# Altium PCB myPCB.PcbDoc
Units mil, origin at the board's own origin, x right, y up, seen from the top; angles counter-clockwise.
Board outline 4172.5 x 3212.5 mil, 2 copper layers (Top Layer, Bottom Layer); 26 components, 19 nets, 122 pads, 1 vias.
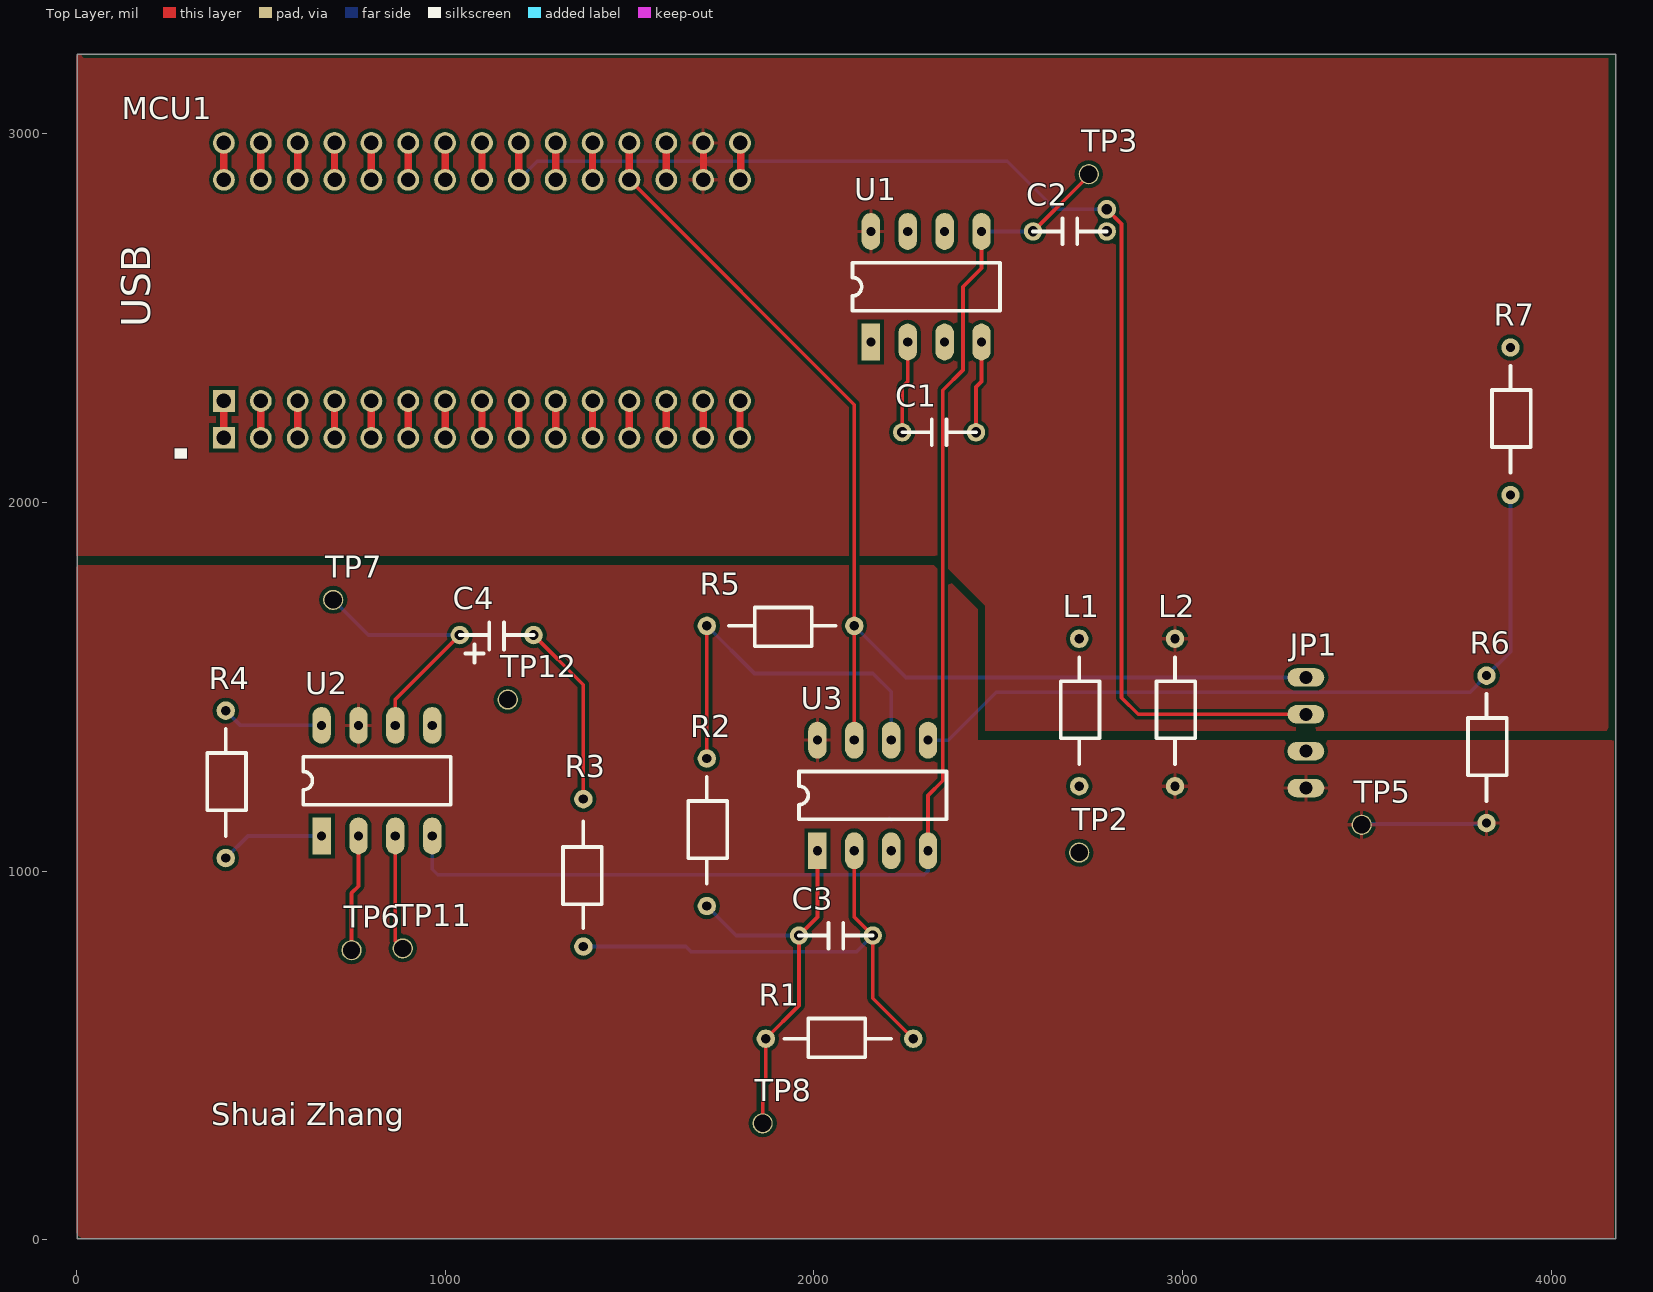
[diagram p0: Top Layer view]
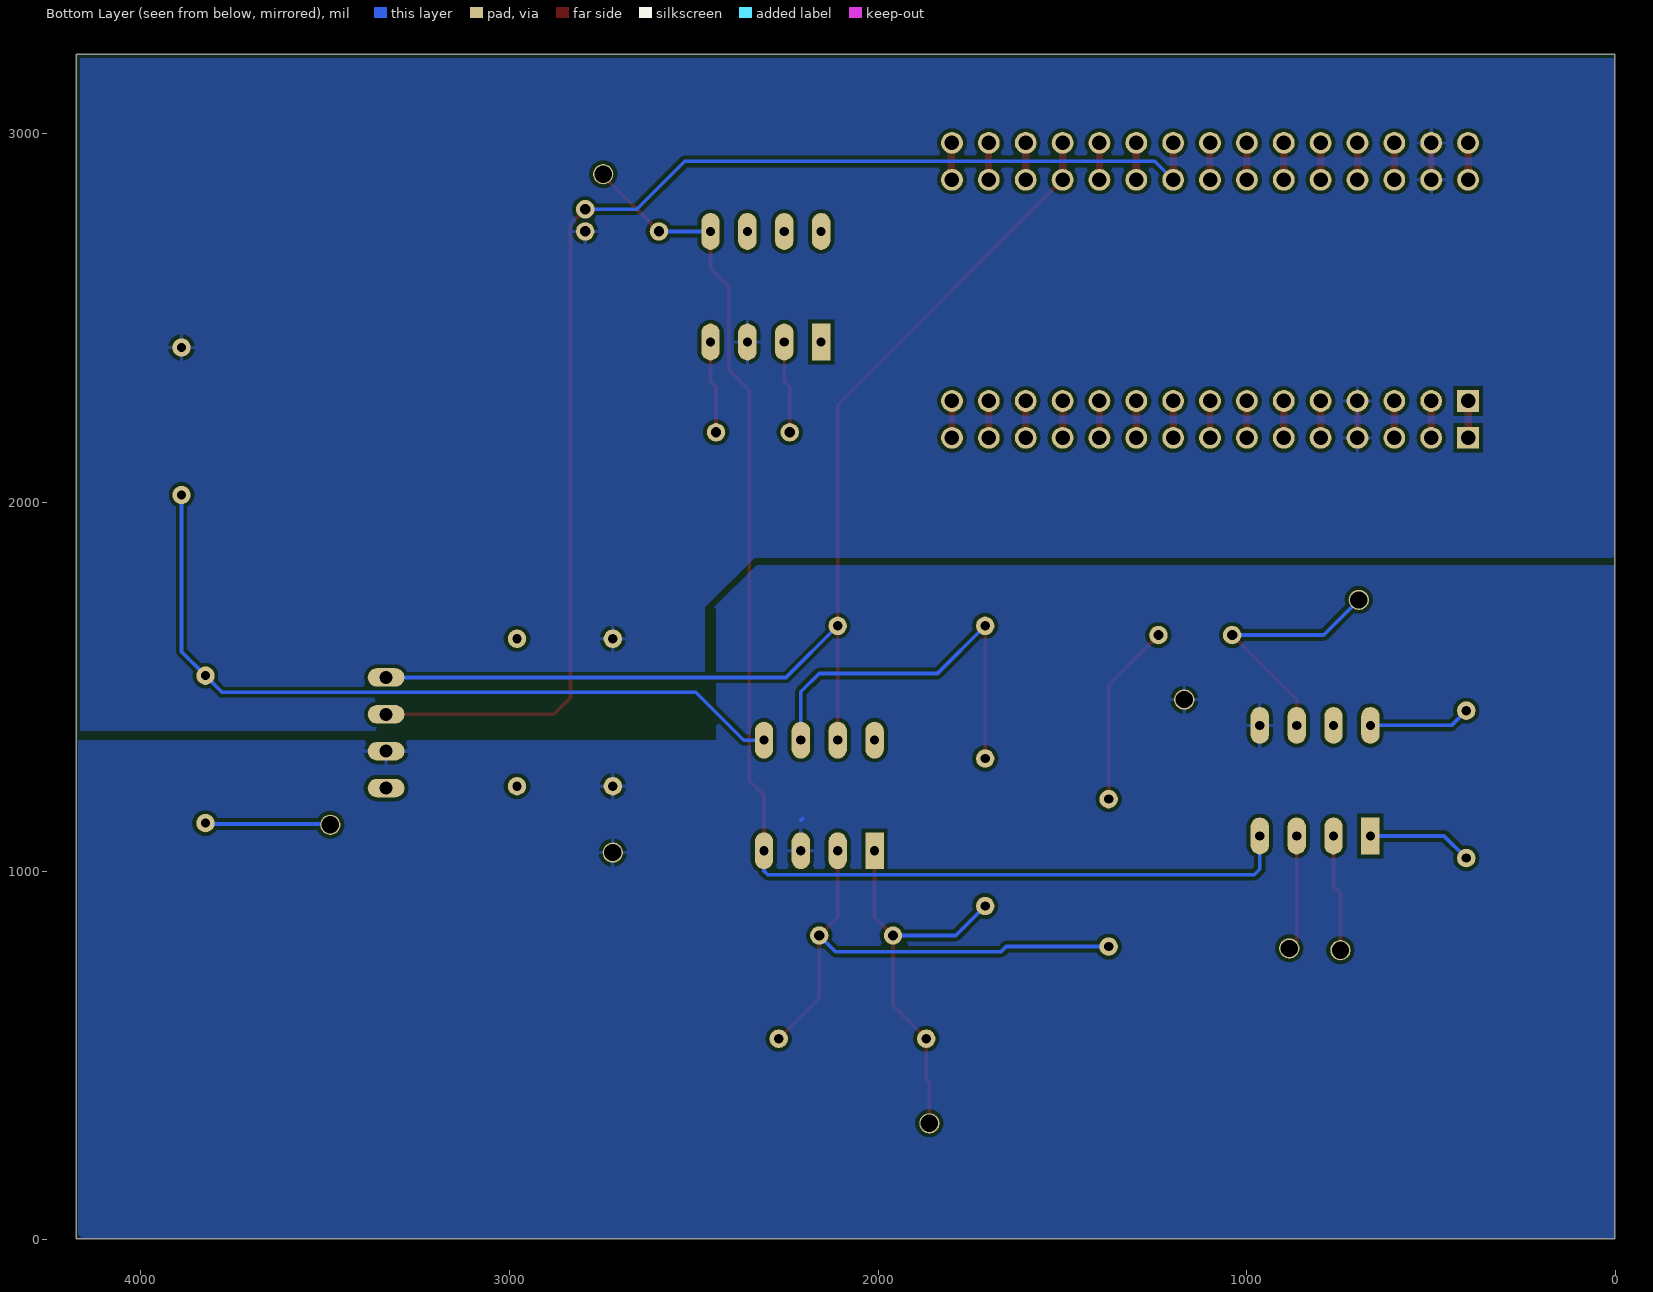
[diagram p1: Bottom Layer view, seen from below]

## Layer stack, top to bottom
Top Solder: solder mask 0.4, Solder Resist, Dk 3.5
Top Layer: signal copper 1.4
Dielectric 1: dielectric 12.6, FR-4, Dk 4.8
Bottom Layer: signal copper 1.4
Bottom Solder: solder mask 0.4, Solder Resist, Dk 3.5

## Board outline
2.5,2.5 4175,2.5 4175,3215 2.5,3215

## Design rules (kind name [scope] priority, off if disabled: settings)
Clearance [All] p1: gap=10 ignorepadtopadclearanceinfootprint=FALSE except(0: Arc-Hole Track-Hole SMDPad-Hole THPad-Hole Via-Hole Fill-Hole Poly-Hole Region-Hole Text-Hole)
PolygonConnect [All] p1: connectstyle=Relief reliefconductorwidth=10 reliefentries=4 polygonreliefangle="90 Angle" airgapwidth=10
RoutingVias [All] p1: holewidth=28 width=50 viastyle="Through Hole" minholewidth=28 minwidth=50 maxholewidth=28 maxwidth=50
SolderMaskExpansion [All] p1: expansion=4
Width [All] p1: maxlimit=10 minlimit=10 preferedwidth=10
30 further rules are at their usual default settings.

## Components (designator, comment, footprint, x,y, rotation, side; value= is the part's Value field where it differs from the comment)
C1 "Cap-10u" Capacitor 2440,2190 r180 top
C2 "Cap-10u" Capacitor 2795,2735 r180 top
C3 "Cap-100pF" Capacitor 1960,825 r0 top
C4 "Cap-22uF" "Capacitor - Polarized" 1040,1640 r0 top
JP1 "Header4x1" "4 pin header" 3335,1225 r180 top
L1 "FerriteBead" RESISTOR 2720,1230 r90 top
L2 "FerriteBead" RESISTOR 2980,1230 r90 top
MCU1 "Nucleo F303K8_STUDENT" "Nucleo F303K8" 1100,2575 r90 top
R1 "Res-3M" RESISTOR 2270,545 r180 top
R2 "20k" RESISTOR 1710,905 r90 top
R3 "15k" RESISTOR 1375,1195 r270 top
R4 "Res-10k" RESISTOR 405,1035 r90 top
R5 "Res-10k" RESISTOR 1710,1665 r0 top
R6 "20k" RESISTOR 3825,1130 r90 top
R7 "Res-10k" RESISTOR 3890,2020 r90 top
TP2 "TestPoint" TestPoint 2718.74,1049.68 r90 top
TP3 "TestPoint" TestPoint 2745,2890 r90 top
TP5 "TestPoint" TestPoint 3485,1125 r90 top
TP6 "TestPoint" TestPoint 745,785 r90 top
TP7 "TestPoint" TestPoint 695,1735 r90 top
TP8 "TestPoint" TestPoint 1860,315 r90 top
TP11 "TestPoint" TestPoint 883.74,789.68 r90 top
TP12 "TestPoint" TestPoint 1168.74,1464.68 r90 top
U1 "TC962" DIP8 2155,2435 r90 top
U2 "LT1920" DIP8 665,1095 r90 top
U3 "TL072" DIP8 2010,1055 r90 top

## Footprints (in the part's own frame and the unit in brackets; to place one, negate y for a bottom-side part, rotate by r counter-clockwise, add the part's x,y. Pads: shape width x height; smd on the part's side, far side on the other; paste and mask are expansions set on the pad)
"4 pin header" [mm]
  oval 2.54x1.27 hole 0.9: 1(0,0) 2(0,-2.54) 3(0,-5.08) 4(0,-7.62)
Capacitor [mil] "200 mil"
  round 50 hole 28: 1(0,0) 2(200,0)
  silkscreen extent 0,-35 200,35
"Capacitor - Polarized" [mil] "200 mil"
  round 50 hole 28: 1(0,0) 2(200,0)
  silkscreen extent 0,-75 200,35
DIP8 [mil]
  rect 100x50 hole 25: 1(0,0)
  oval 100x50 hole 25: 2(0,-100) 3(0,-200) 4(0,-300) 5(300,-300) 6(300,-200) 7(300,-100) 8(300,0)
  silkscreen extent 85,-350 215,50
"Nucleo F303K8" [mm] "Nucleo Header"
  rect 1.5x1.5 hole 1: 1(-10.16,17.78) 1(-7.62,17.78)
  round 1.5 hole 1: 2(-10.16,15.24) 2(-7.62,15.24) 3(-10.16,12.7) 3(-7.62,12.7) 4(-10.16,10.16) 4(-7.62,10.16) 5(-10.16,7.62) 5(-7.62,7.62) 6(-10.16,5.08) 6(-7.62,5.08) 7(-10.16,2.54) 7(-7.62,2.54) 8(-10.16,0) 8(-7.62,0) 9(-10.16,-2.54) 9(-7.62,-2.54) 10(-10.16,-5.08) 10(-7.62,-5.08) 11(-10.16,-7.62) 11(-7.62,-7.62) 12(-10.16,-10.16) 12(-7.62,-10.16) 13(-10.16,-12.7) 13(-7.62,-12.7) 14(-10.16,-15.24) 14(-7.62,-15.24) 15(-10.16,-17.78) 15(-7.62,-17.78) 16(7.62,-17.78) 16(10.16,-17.78) 17(7.62,-15.24) 17(10.16,-15.24) 18(7.62,-12.7) 18(10.16,-12.7) 19(7.62,-10.16) 19(10.16,-10.16) 20(7.62,-7.62) 20(10.16,-7.62) 21(7.62,-5.08) 21(10.16,-5.08) 22(7.62,-2.54) 22(10.16,-2.54) 23(7.62,0) 23(10.16,0) 24(7.62,2.54) 24(10.16,2.54) 25(7.62,5.08) 25(10.16,5.08) 26(7.62,7.62) 26(10.16,7.62) 27(7.62,10.16) 27(10.16,10.16) 28(7.62,12.7) 28(10.16,12.7) 29(7.62,15.24) 29(10.16,15.24) 30(7.62,17.78) 30(10.16,17.78)
  Top Layer lines w0.508: -10.16,17.78 -7.62,17.78 ; 7.62,17.78 10.16,17.78 ; -10.16,15.24 -7.62,15.24 ; 7.62,15.24 10.16,15.24 ; -10.16,12.7 -7.62,12.7 ; 7.62,12.7 10.16,12.7 ; -10.16,10.16 -7.62,10.16 ; 7.62,10.16 10.16,10.16 ; -10.16,7.62 -7.62,7.62 ; 7.62,7.62 10.16,7.62 ; -10.16,5.08 -7.62,5.08 ; 7.62,5.08 10.16,5.08 ; -10.16,2.54 -7.62,2.54 ; 7.62,2.54 10.16,2.54 ; -10.16,0 -7.62,0 ; 7.62,0 10.16,0 ; -10.16,-2.54 -7.62,-2.54 ; 7.62,-2.54 10.16,-2.54 ; -10.16,-5.08 -7.62,-5.08 ; 7.62,-5.08 10.16,-5.08 ; -10.16,-7.62 -7.62,-7.62 ; 7.62,-7.62 10.16,-7.62 ; -10.16,-10.16 -7.62,-10.16 ; 7.62,-10.16 10.16,-10.16 ; -10.16,-12.7 -7.62,-12.7 ; 7.62,-12.7 10.16,-12.7 ; -10.16,-15.24 -7.62,-15.24 ; -10.16,-17.78 -7.62,-17.78 ; 7.722,-17.831 10.262,-17.831 ; 7.442,-15.265 7.62,-15.265 ; 7.442,-15.265 7.62,-15.265 ; 7.442,-15.265 7.62,-15.265 ; 7.442,-15.265 7.62,-15.265 ; 7.442,-15.265 7.62,-15.265 ; 7.442,-15.265 7.62,-15.265 ; 7.442,-15.265 7.62,-15.265 ; 7.442,-15.265 7.62,-15.265 ; 7.442,-15.265 7.62,-15.265 ; 7.442,-15.265 7.62,-15.265 ; 7.442,-15.265 7.62,-15.265 ; 7.442,-15.265 7.62,-15.265 ; 7.442,-15.265 7.62,-15.265 ; 7.442,-15.265 7.62,-15.265 ; 7.442,-15.265 7.62,-15.265 ; 7.442,-15.265 7.62,-15.265 ; 7.62,-15.265 9.982,-15.265 ; 7.62,-15.265 9.982,-15.265 ; 7.62,-15.265 9.982,-15.265 ; 7.62,-15.265 9.982,-15.265 ; 7.62,-15.265 9.982,-15.265 ; 7.62,-15.265 9.982,-15.265 ; 7.62,-15.265 9.982,-15.265 ; 7.62,-15.265 9.982,-15.265 ; 7.62,-15.265 9.982,-15.265 ; 7.62,-15.265 9.982,-15.265 ; 7.62,-15.265 9.982,-15.265 ; 7.62,-15.265 9.982,-15.265 ; 7.62,-15.265 9.982,-15.265 ; 7.62,-15.265 9.982,-15.265 ; 7.62,-15.265 9.982,-15.265 ; 7.62,-15.265 9.982,-15.265
RESISTOR [mil]
  round 50 hole 25: 1(0,0) 2(400,0)
  silkscreen extent 60,-55 350,50
TestPoint [mil]
  round 55 hole 47 mask+3: 1(0.32,-1.26)

## Part data
C1 C2: Capacitance=10μF, Manufacturer="TDK Corporation", Manufacturer Part Number=FK26X7R1C106K, Operating Temperature="-55°C ~ 125°C", Package / Case=Radial, Ratings=-, Supplier Part Number 1=445-8549-ND, Temperature Coefficient=X7R, Tolerance=±10%, Voltage - Rated=16V, Applications="General Purpose", Category=Capacitors, ComponentLink1Description=https://product.tdk.com/info/en/documents/catalog/leadmlcc_conventional_fk_en.pdf, ComponentLink1URL=https://product.tdk.com/info/en/documents/catalog/leadmlcc_conventional_fk_en.pdf, Features=-, Height - Seated (Max)="0.236\" (6.00mm)", Lead Spacing="0.197\" (5.00mm)", Lead Style="Formed Leads - Kinked", Mounting Type="Through Hole", Packaging=Bulk, Pricing 1="1=0.45, 10=0.319, 100=0.2101, 250=0.17896, 500=0.1556, 1000=0.13226, 5000=0.1167, 10000=0.10892, 25000=0.10503 (USD)", RoHS="RoHS Compliant", Size / Dimension="0.217\" L x 0.138\" W (5.50mm x 3.50mm)", Stock 1=7933, Supplier 1=Digi-Key, Thickness (Max)=-
L1 L2: Current Rating (Max)=5A, DC Resistance (DCR) (Max)="10 mOhm", Impedance @ Frequency="75 Ohm @ 100MHz", Manufacturer="Laird-Signal Integrity Products", Manufacturer Part Number=28L0138-10R-10, Operating Temperature=-, Package / Case=Axial, Supplier Part Number 1=240-2438-1-ND, Category=Filters, ComponentLink1Description=http://media.digikey.com/pdf/Data%20Sheets/Laird%20Technologies/28L0138-10R-10_Dwg.pdf, ComponentLink1URL=http://media.digikey.com/pdf/Data%20Sheets/Laird%20Technologies/28L0138-10R-10_Dwg.pdf, Filter Type=-, Height (Max)=-, Mounting Type="Through Hole", Number of Lines=1, Packaging="Cut Tape (CT)", Part Status=Active, Pricing 1="1=0.1, 10=0.076, 25=0.0684, 50=0.05, 100=0.0433, 250=0.03416, 500=0.02884, 1000=0.02429 (USD)", Ratings=-, RoHS="RoHS Compliant", Size / Dimension="0.138\" Dia x 0.175\" L (3.51mm x 4.45mm)", Stock 1=25546, Supplier 1=Digi-Key
MCU1: "Nucleo F303K8", Current Rating=3A, Insulation Color=Black, Manufacturer="Sullins Connector Solutions", Manufacturer Part Number=PPTC151LFBN-RC, Material Flammability Rating="UL94 V-0", Operating Temperature="-40°C ~ 105°C", Supplier Part Number 1=497-15981-ND, Voltage Rating=250V, Applications=-, Category="Connectors, Interconnects", ComponentLink1Description=http://www.sullinscorp.com/drawings/78_P(N)PxCxxxLFBN-RC,_10492-H.pdf, ComponentLink1URL=http://www.sullinscorp.com/drawings/78_P(N)PxCxxxLFBN-RC,_10492-H.pdf, ComponentLink2Description=http://www.farnell.com/datasheets/2064195.pdf?src-supplier=Farnell, ComponentLink2URL=http://www.farnell.com/datasheets/2064195.pdf?src-supplier=Farnell, ComponentLink3Description=http://www.st.com/content/ccc/resource/technical/document/data_brief/b1/d8/13/d4/b0/b7/4b/6e/DM00214578.pdf/files/DM00214578.pdf/jcr:content/translations/en.DM00214578.pdf?src-supplier=Digi-Key, ComponentLink3URL=http://www.st.com/content/ccc/resource/technical/document/data_brief/b1/d8/13/d4/b0/b7/4b/6e/DM00214578.pdf/files/DM00214578.pdf/jcr:content/translations/en.DM00214578.pdf?src-supplier=Digi-Key, ComponentLink4Description=http://www.farnell.com/datasheets/1966773.pdf?src-supplier=Element14, ComponentLink4URL=http://www.farnell.com/datasheets/1966773.pdf?src-supplier=Element14, ComponentLink5Description=http://www.farnell.com/datasheets/2064195.pdf?src-supplier=Newark, ComponentLink5URL=http://www.farnell.com/datasheets/2064195.pdf?src-supplier=Newark, ComponentLink6Description=http://www.st.com/st-web-ui/static/active/en/resource/technical/document/user_manual/DM00116575.pdf?s_searchtype=keyword&src-supplier=Avnet+Asia, ComponentLink6URL=http://www.st.com/st-web-ui/static/active/en/resource/technical/document/user_manual/DM00116575.pdf?s_searchtype=keyword&src-supplier=Avnet+Asia, ComponentLink7Description=http://www.st.com/st-web-ui/static/active/en/resource/technical/document/user_manual/DM00116575.pdf?s_searchtype=keyword&src-supplier=Avnet, ComponentLink7URL=http://www.st.com/st-web-ui/static/active/en/resource/technical/document/user_manual/DM00116575.pdf?s_searchtype=keyword&src-supplier=Avnet, Connector Type=Header, Contact Finish - Mating=Tin, Contact Finish - Post=Tin, Contact Finish Thickness - Mating=-, Contact Finish Thickness - Post=-, Contact Length - Post="0.126\" (3.20mm)", Contact Material="Phosphor Bronze", Contact Shape=Square, Contact Type="Female Socket", Core Architecture=ARM, Evaluation Kit=Yes, Fastening Type=Push-Pull, Features=-, Ingress Protection=-, Insulation Height="0.335\" (8.51mm)", Insulation Material=Polyester, Lead Free="Lead Free", Mated Stacking Heights=-, Mounting Type="Through Hole", Number of Bits=32, Number of Positions=15, Number of Positions Loaded=All, Number of Rows=1, Packaging=Bulk, Part Status=Active, Pitch - Mating="0.100\" (2.54mm)", Pricing 1="1=10.99000 (USD)", REACH SVHC="No SVHC", RoHS="RoHS Compliant", Row Spacing - Mating=-, Stock 1=117, Style="Board to Board", Supplier 1=Digi-Key, Termination=Solder
R1: Manufacturer="Stackpole Electronics Inc.", Manufacturer Part Number=CF14JT30K0, Operating Temperature="-55°C ~ 155°C", Package / Case=Axial, Power (Watts)="0.25W, 1/4W", Resistance (Ohms)=3Meg, Temperature Coefficient="0/ -500ppm/°C", Tolerance=±5%, Category=Resistors, ComponentLink1Description=https://www.seielect.com/Catalog/SEI-CF_CFM.pdf, ComponentLink1URL=https://www.seielect.com/Catalog/SEI-CF_CFM.pdf, Composition="Carbon Film", Failure Rate=-, Features="Flame Retardant Coating, Safety", Height - Seated (Max)=-, Packaging="Cut Tape (CT)", Part Status=Active, RoHS="RoHS Compliant", Size / Dimension="0.091\" Dia x 0.236\" L (2.30mm x 6.00mm)", Supplier 1=Arrow, Supplier Device Package=Axial
R2 R6: library part Res-20k, Supplier 1=Arrow
R3: library part Res-15k, Supplier 1=Arrow
R4 R5 R7: Manufacturer="Stackpole Electronics Inc.", Manufacturer Part Number=CF14JT10K0, Operating Temperature="-55°C ~ 155°C", Package / Case=Axial, Power (Watts)="0.25W, 1/4W", Resistance (Ohms)=10k, Supplier Part Number 1=CF14JT10K0CT-ND, Temperature Coefficient="0/ -500ppm/°C", Tolerance=±5%, Category=Resistors, ComponentLink1Description=http://www.seielect.com/catalog/SEI-CF_CFM.pdf, ComponentLink1URL=http://www.seielect.com/catalog/SEI-CF_CFM.pdf, Composition="Carbon Film", Features="Flame Retardant Coating, Safety", Height=-, Number of Terminations=2, Packaging="Cut Tape (CT)", Pricing 1="1=0.1, 10=0.04, 50=0.022, 100=0.0162, 250=0.01236, 500=0.0099, 1000=0.00729, 2500=0.00632 (USD)", RoHS="RoHS Compliant", Size / Dimension="0.091\" Dia x 0.256\" L (2.30mm x 6.50mm)", Stock 1=1509635, Supplier 1=Digi-Key, Supplier Device Package=Axial
U1: Supplier Part Number 1=TC962CPA-ND, Supplier 1=Digi-Key
U2: Supplier Part Number 1=LT1920CN8#PBF-ND, Supplier 1=Digi-Key
U3: Current - Output / Channel=-, Current - Supply=1.4mA, Manufacturer="Texas Instruments", Manufacturer Part Number=TL072IP, Operating Temperature="-40°C ~ 85°C", Package / Case="8-DIP (0.300\", 7.62mm)", Supplier Device Package=8-PDIP, Supplier Part Number 1=296-14997-5-ND, Voltage - Supply, Single/Dual (±)="7 V ~ 36 V, ±3.5 V ~ 18 V", -3db Bandwidth=-, Amplifier Type=J-FET, Category="Integrated Circuits (ICs)", ComponentLink1Description=http://www.ti.com/lit/ds/symlink/tl071a.pdf, ComponentLink1URL=http://www.ti.com/lit/ds/symlink/tl071a.pdf, Mounting Type="Through Hole", Number of Circuits=2, Output Type=-, Packaging=Tube, Part Status=Active, Pricing 1="1=0.69, 10=0.607, 100=0.4655, 500=0.368, 1000=0.2944 (USD)", RoHS="RoHS Compliant", Slew Rate="13 V/μs", Stock 1=2537, Supplier 1=Digi-Key
C3: Supplier 1=Digi-Key
TP2 TP3 TP5 TP6 TP7 TP8 TP11 TP12: Usage=DNP

## Via types
v1: diameter 50, hole 28, Top Layer to Bottom Layer, 1 vias

## Nets (pads, with @x,y where several pads share a name; then routed paths per layer and width w, separated by ;. In a path a pad name is that pad's centre, name@x,y a point inside that pad or via, vN(x,y) a via of type N, cw(c..) or ccw(c..) an arc to the next point about the centre after c; other vN are vias at no path point)
3V3: L2.2 MCU1.17 U1.8 | length 100
  Top Layer w10: MCU1.17@1700,2875 MCU1.17@1700,2975
A3V3: JP1.1 L2.1 R6.1 TP5.1 U2.7 U3.8 | length 340.7
  Bottom Layer w10: TP5.1 3488.6,1127.66 3822.66,1127.66 R6.1
AGND: JP1.2 L1.1 TP2.1 TP12.1 U2.5 U3.3 | length 7.3
  Top Layer w10: TP2.1@2719.74,1050 TP2.1
  Bottom Layer w10: 2205,1143 2210,1138
Aout: JP1.3 MCU1.22 | length 3529.8
  Top Layer w10: v1(2795,2795) 2835,2755 2835,1470 2880,1425 JP1.3
  Bottom Layer w10: MCU1.22@1200,2875 1250,2925 2525,2925 2655,2795 v1(2795,2795)
Final_Signal: JP1.4 MCU1.19 R5.2 U3.7 | length 3055.7
  Top Layer w10: MCU1.19@1500,2875 2110,2265 R5.2 U3.7
  Bottom Layer w10: R5.2 2250,1525 JP1.4
GND: C2.1 L1.2 MCU1.4 MCU1.29 R7.2 U1.3
Neg_3V3: C2.2 TP3.1 U1.5 U2.4 U3.4 | length 3598.4
  Top Layer w10: U3.4 2310,1205 2350,1245 2350,2304 2405,2359 2405,2585 2455,2635 U1.5 ; C2.2 2746.26,2886.26 TP3.1
  Bottom Layer w10: U2.4 965,1005 980,990 2300,990 2310,1000 U3.4 ; U1.5 C2.2
NetC1_1: C1.1 U1.4 | length 251.2
  Top Layer w10: C1.1 2440,2313 2455,2328 U1.4
NetC1_2: C1.2 U1.2 | length 251.2
  Top Layer w10: C1.2 2240,2313 2255,2328 U1.2
NetC3_2: C3.2 R1.1 R3.2 U3.2 | length 1385.3
  Top Layer w10: U3.2 2110,875 C3.2 2160,655 R1.1
  Bottom Layer w10: R3.2 1653,795 1667,781 2116,781 C3.2
NetC4_1: C4.1 TP7.1 U2.6 | length 700.7
  Top Layer w10: U2.6 865,1465 C4.1
  Bottom Layer w10: TP7.1 791.58,1640 C4.1
NetC4_2: C4.2 R3.1 | length 500.9
  Top Layer w10: C4.2 1375,1505 R3.1
NetR2_2: R2.2 R5.1 U3.6 | length 1065.1
  Top Layer w10: R2.2 R5.1
  Bottom Layer w10: R5.1 1839,1536 2160,1536 2210,1486 U3.6
NetR4_1: R4.1 U2.1 | length 284.9
  Bottom Layer w10: R4.1 465,1095 U2.1
NetR4_2: R4.2 U2.8 | length 276.6
  Bottom Layer w10: R4.2 445,1395 U2.8
NetR6_2: R6.2 R7.1 U3.5 | length 2104.4
  Bottom Layer w10: U3.5 2365,1355 2495,1485 3780,1485 R6.2 3890,1595 R7.1
NetTP6_1: TP6.1 U2.2 | length 317.4
  Top Layer w10: TP6.1 746.26,940 765,958.74 U2.2
NetTP11_1: TP11.1 U2.3 | length 313.3
  Top Layer w10: U2.3 865,810 TP11.1
Signal_Amplified: C3.1 R1.2 R2.1 TP8.1 U3.1 | length 1084.4
  Top Layer w10: TP8.1 1861.26,425 1870,433.74 R1.2 1960,635 C3.1 2010,875 U3.1
  Bottom Layer w10: R2.1 1790,825 C3.1
pads on no net: MCU1.1 MCU1.2 MCU1.3 MCU1.5 MCU1.6 MCU1.7 MCU1.8 MCU1.9 MCU1.10 MCU1.11 MCU1.12 MCU1.13 MCU1.14 MCU1.15 MCU1.16 MCU1.18 MCU1.20 MCU1.21 MCU1.23 MCU1.24 MCU1.25 MCU1.26 MCU1.27 MCU1.28 MCU1.30 U1.1 U1.6 U1.7

## Polygon pours and split planes (outlines as drawn)
A3V3 on Top Layer "top a3v3" (solid, remove dead copper, pour order 16): 0,5 0,1825 5,1830 2325,1830 2445,1710 2445,1355 4165,1355 4170,1360 4170,5 10,5 5,10
3V3 on Top Layer "Top 3v3" (solid, remove dead copper, pour order 2): 20,3205 4155,3205 4155,1390 4160,1385 4155,1380 2465,1380 2465,1720 2330,1855 0,1855 0,3215 5,3220
AGND on Bottom Layer "bot agnd" (solid, remove dead copper, pour order 14): 5,1830 2330,1830 2445,1715 2440,1710 2440,1355 4170,1355 4170,15 4160,5 5,5
GND on Bottom Layer "bot gnd" (solid, remove dead copper, pour order 12): 4165,3205 4165,1380 2470,1380 2470,1715 2335,1850 0,1850 5,1855 5,3205

## Silkscreen, mask and mechanical layers (free items; w line width, h text height)
Top Overlay:
  text "Shuai Zhang" at 365,310 h60
Mechanical 1:
  lines w10: 5,3200 4140,3200 4140,30 20,30 20,3200

## Text inside footprints (layer, text, board x,y; h text height)
MCU1: Top Overlay "USB" at 200,2475 h78.74 r90